# Altium PCB IMX6.PcbDoc (part 1 of 3)
Units mil, origin at the board's own origin, x right, y up, seen from the top; angles counter-clockwise.
Board outline 7950 x 5550 mil, 4 copper layers (Top Layer, GND, VCC, Bottom Layer), stack 30.634 mil thick; 238 components, 318 nets, 1023 pads, 393 vias.
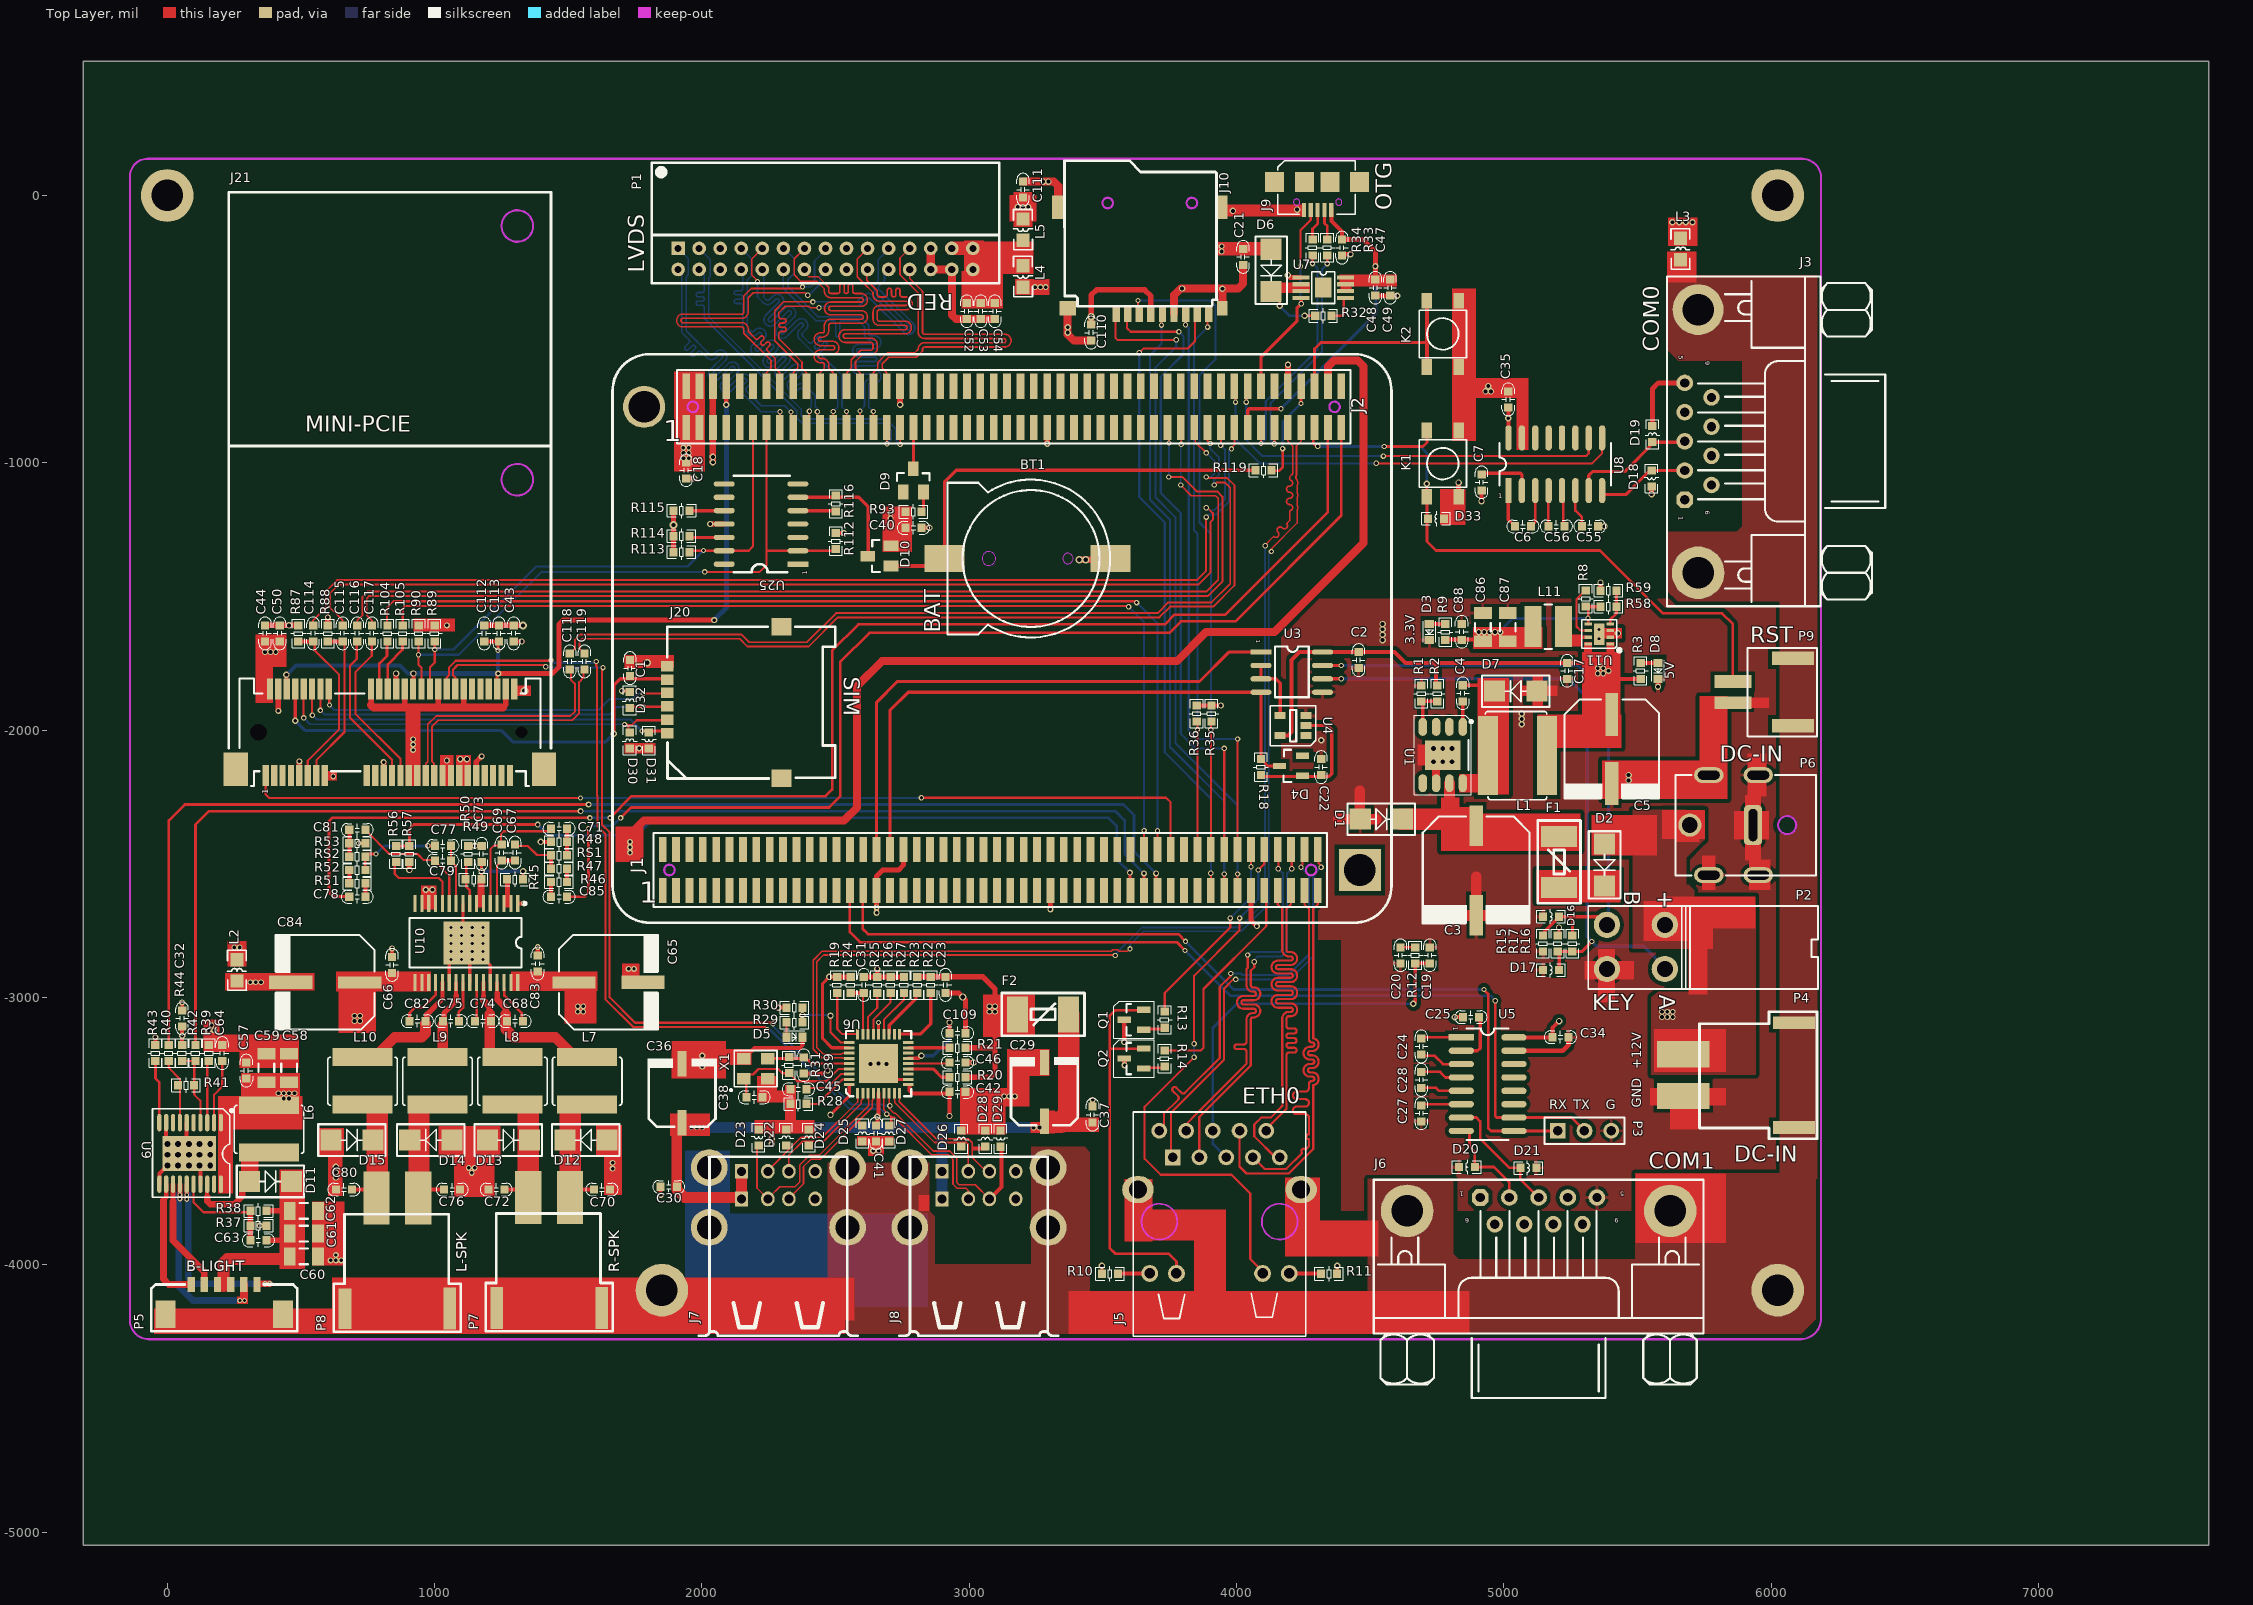
[diagram p0: Top Layer view]
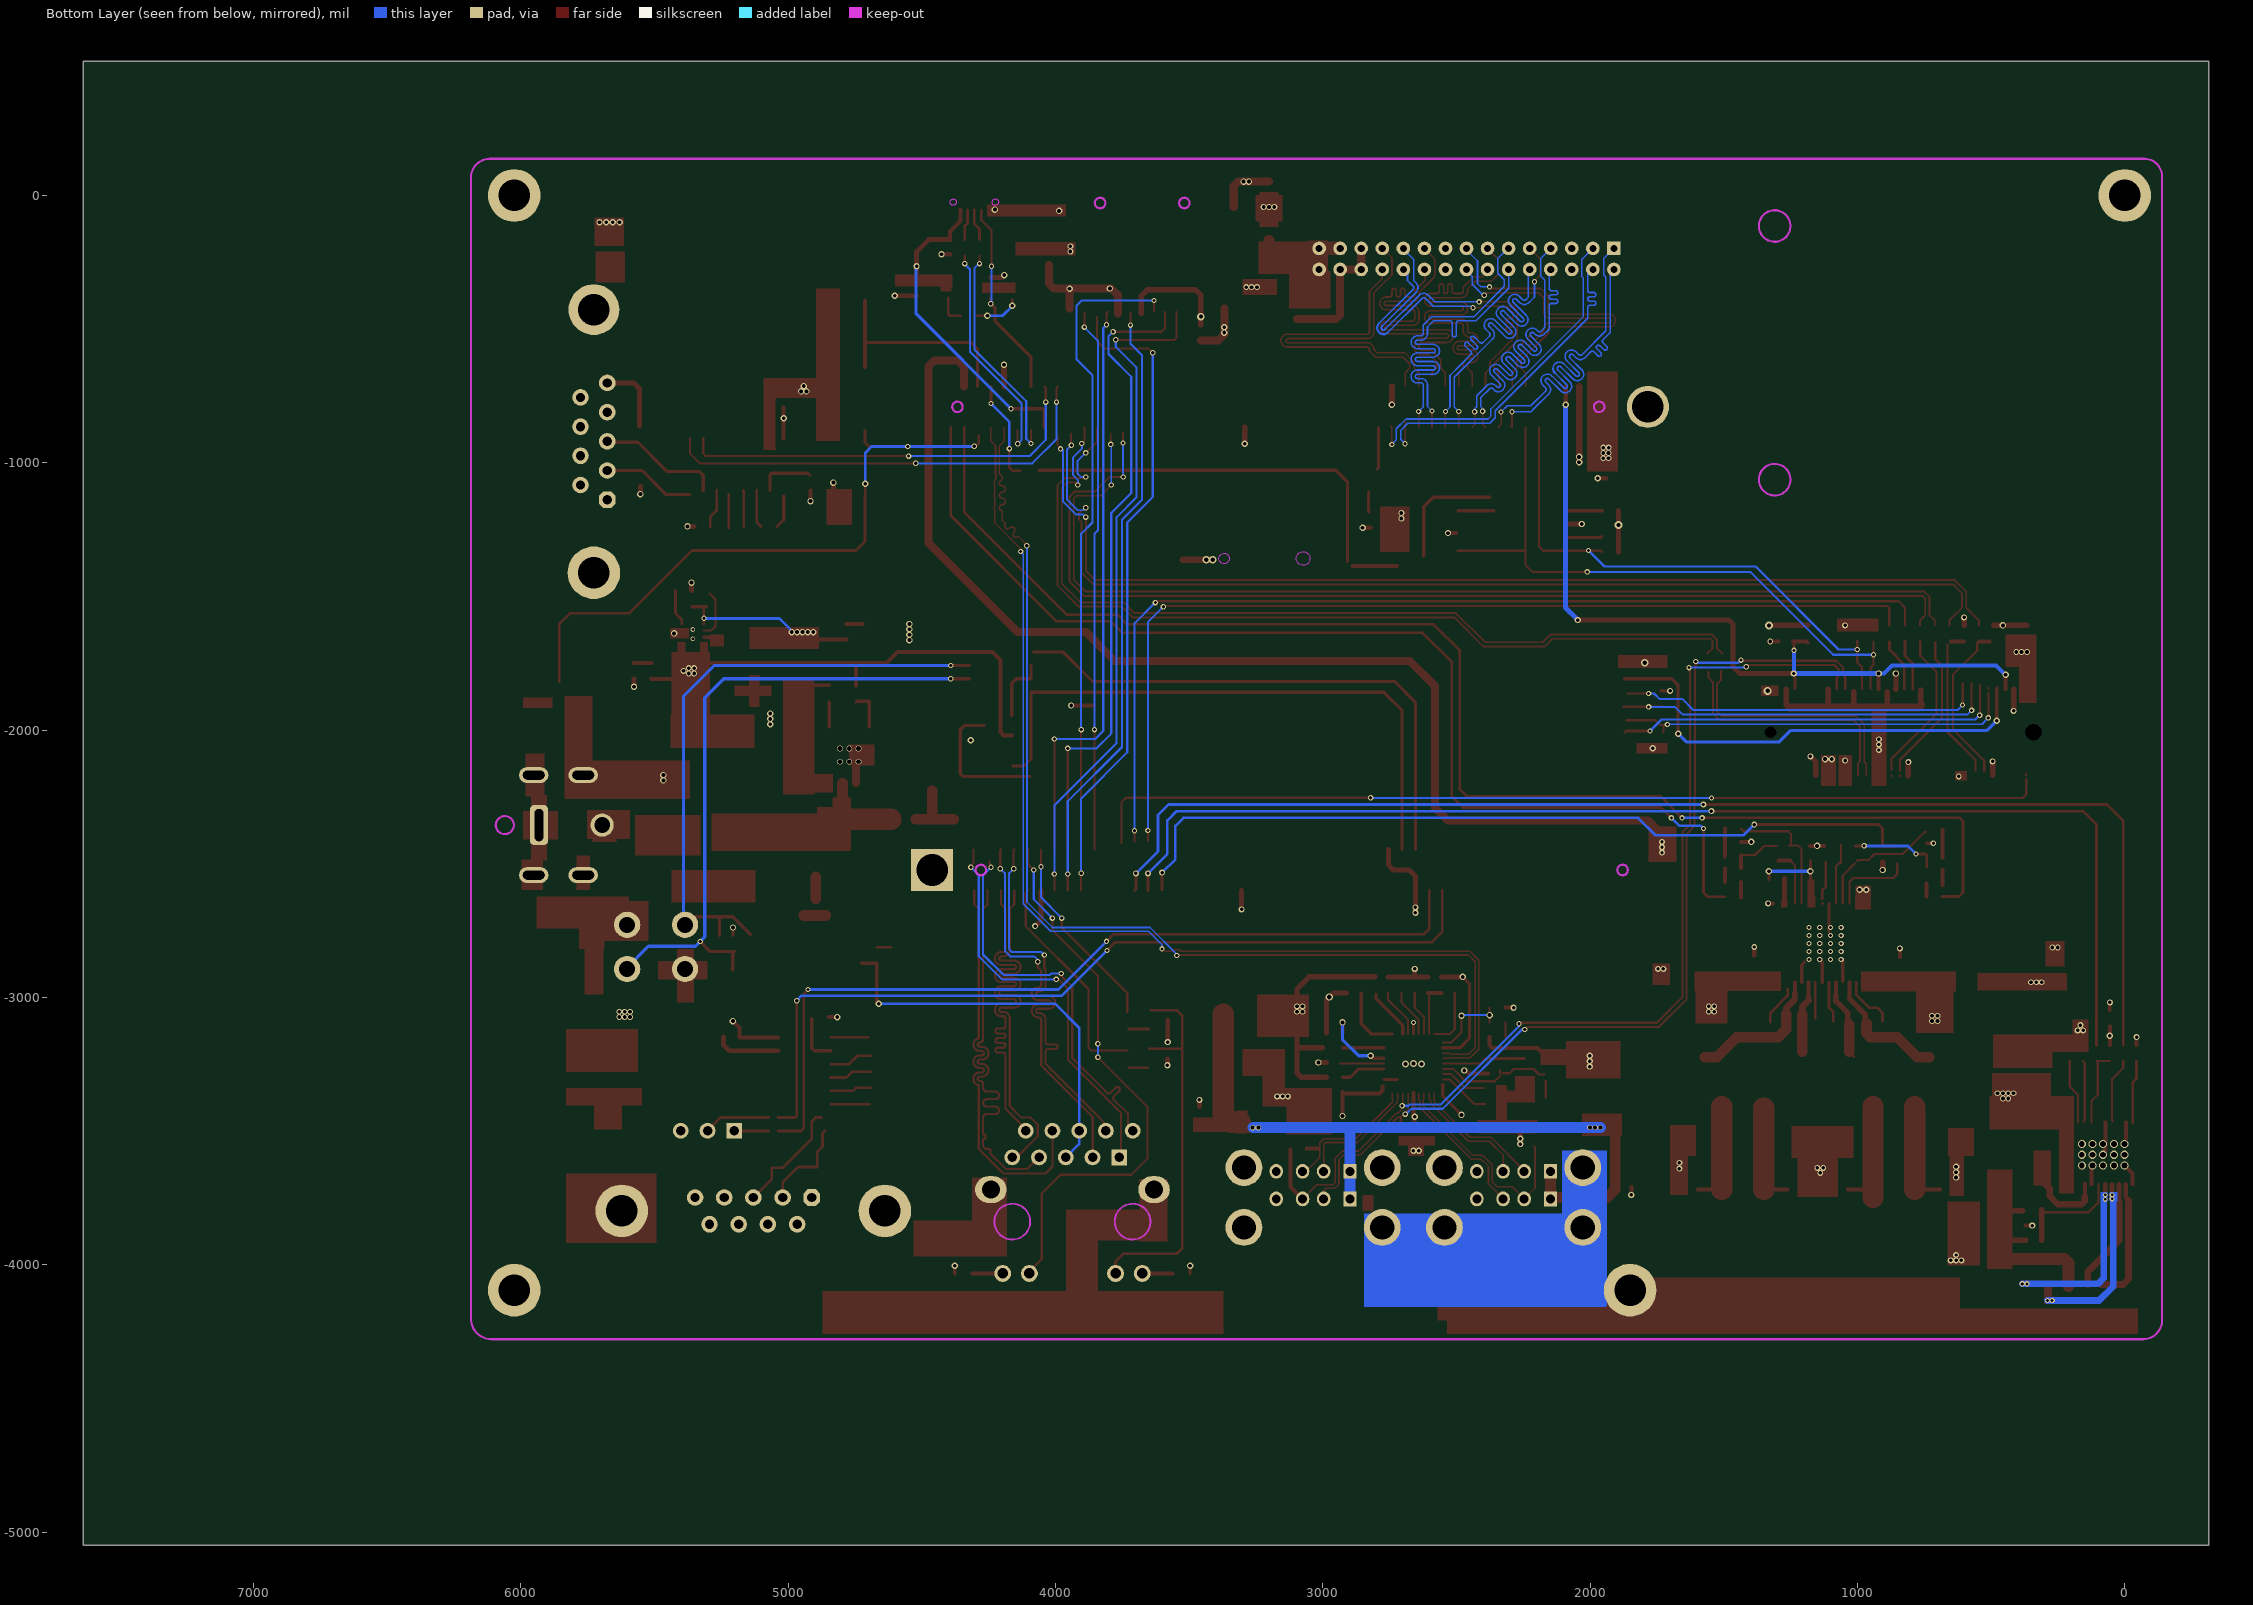
[diagram p1: Bottom Layer view, seen from below]
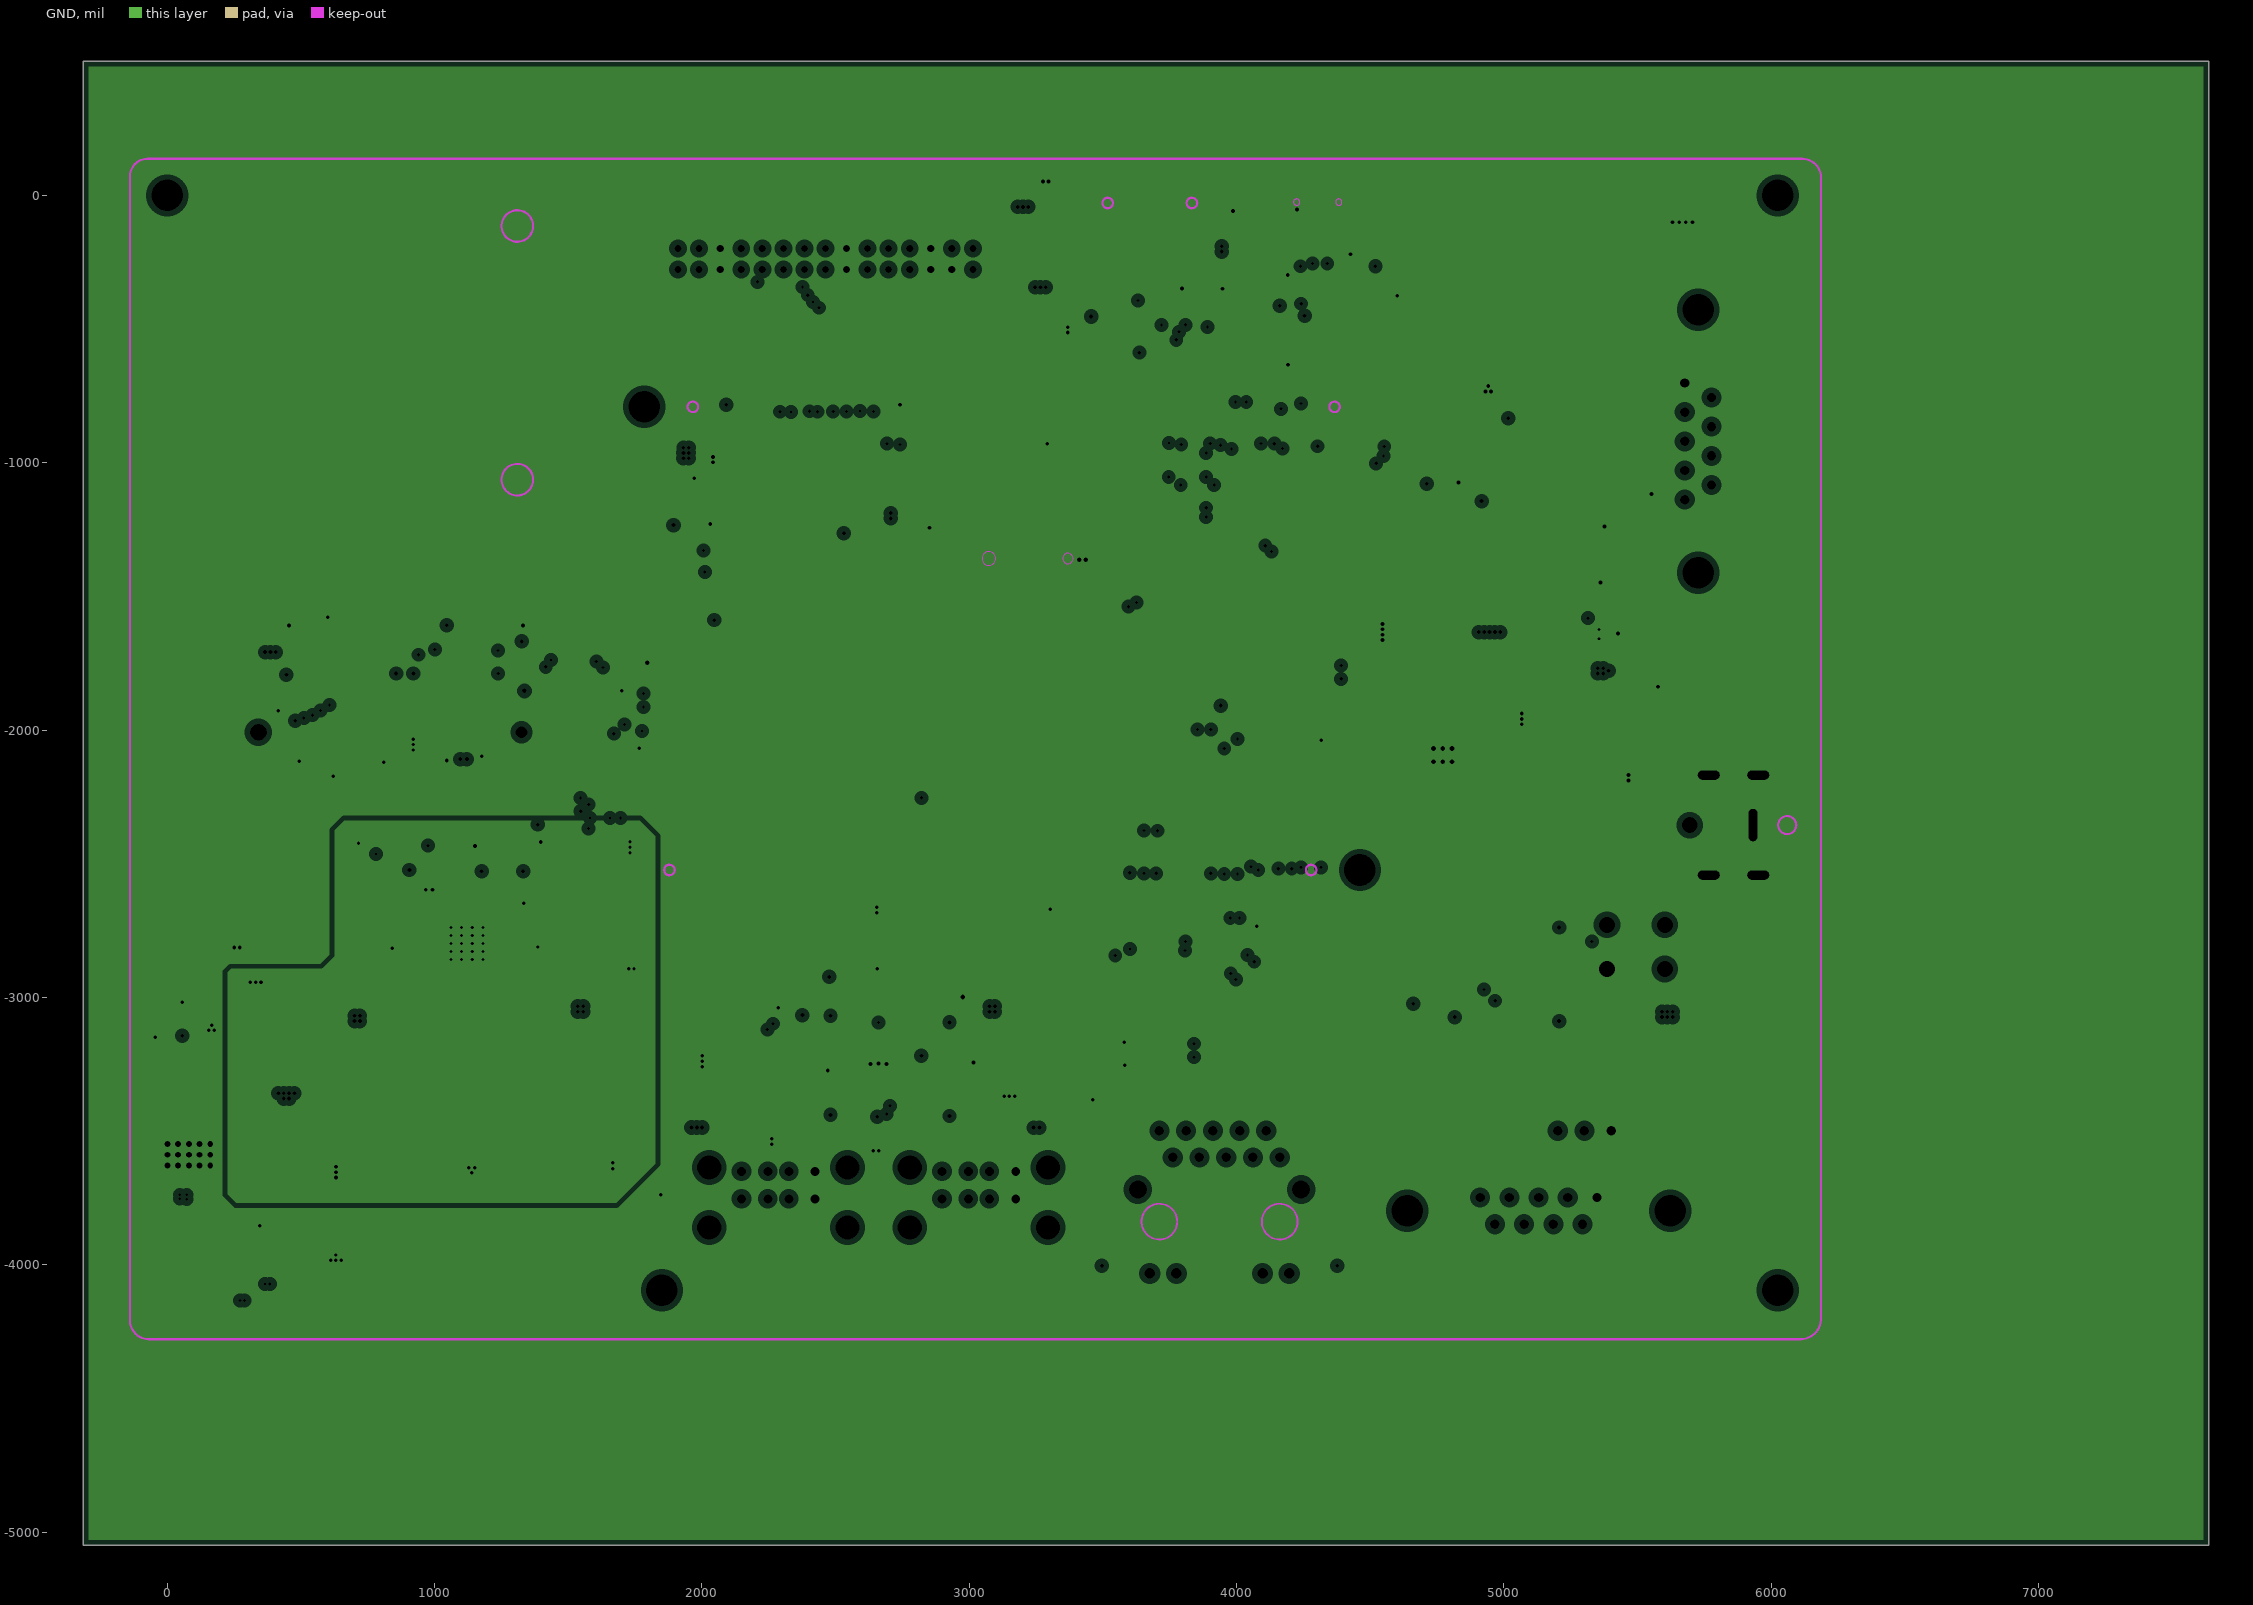
[diagram p2: GND, clearances drawn from the general rule]
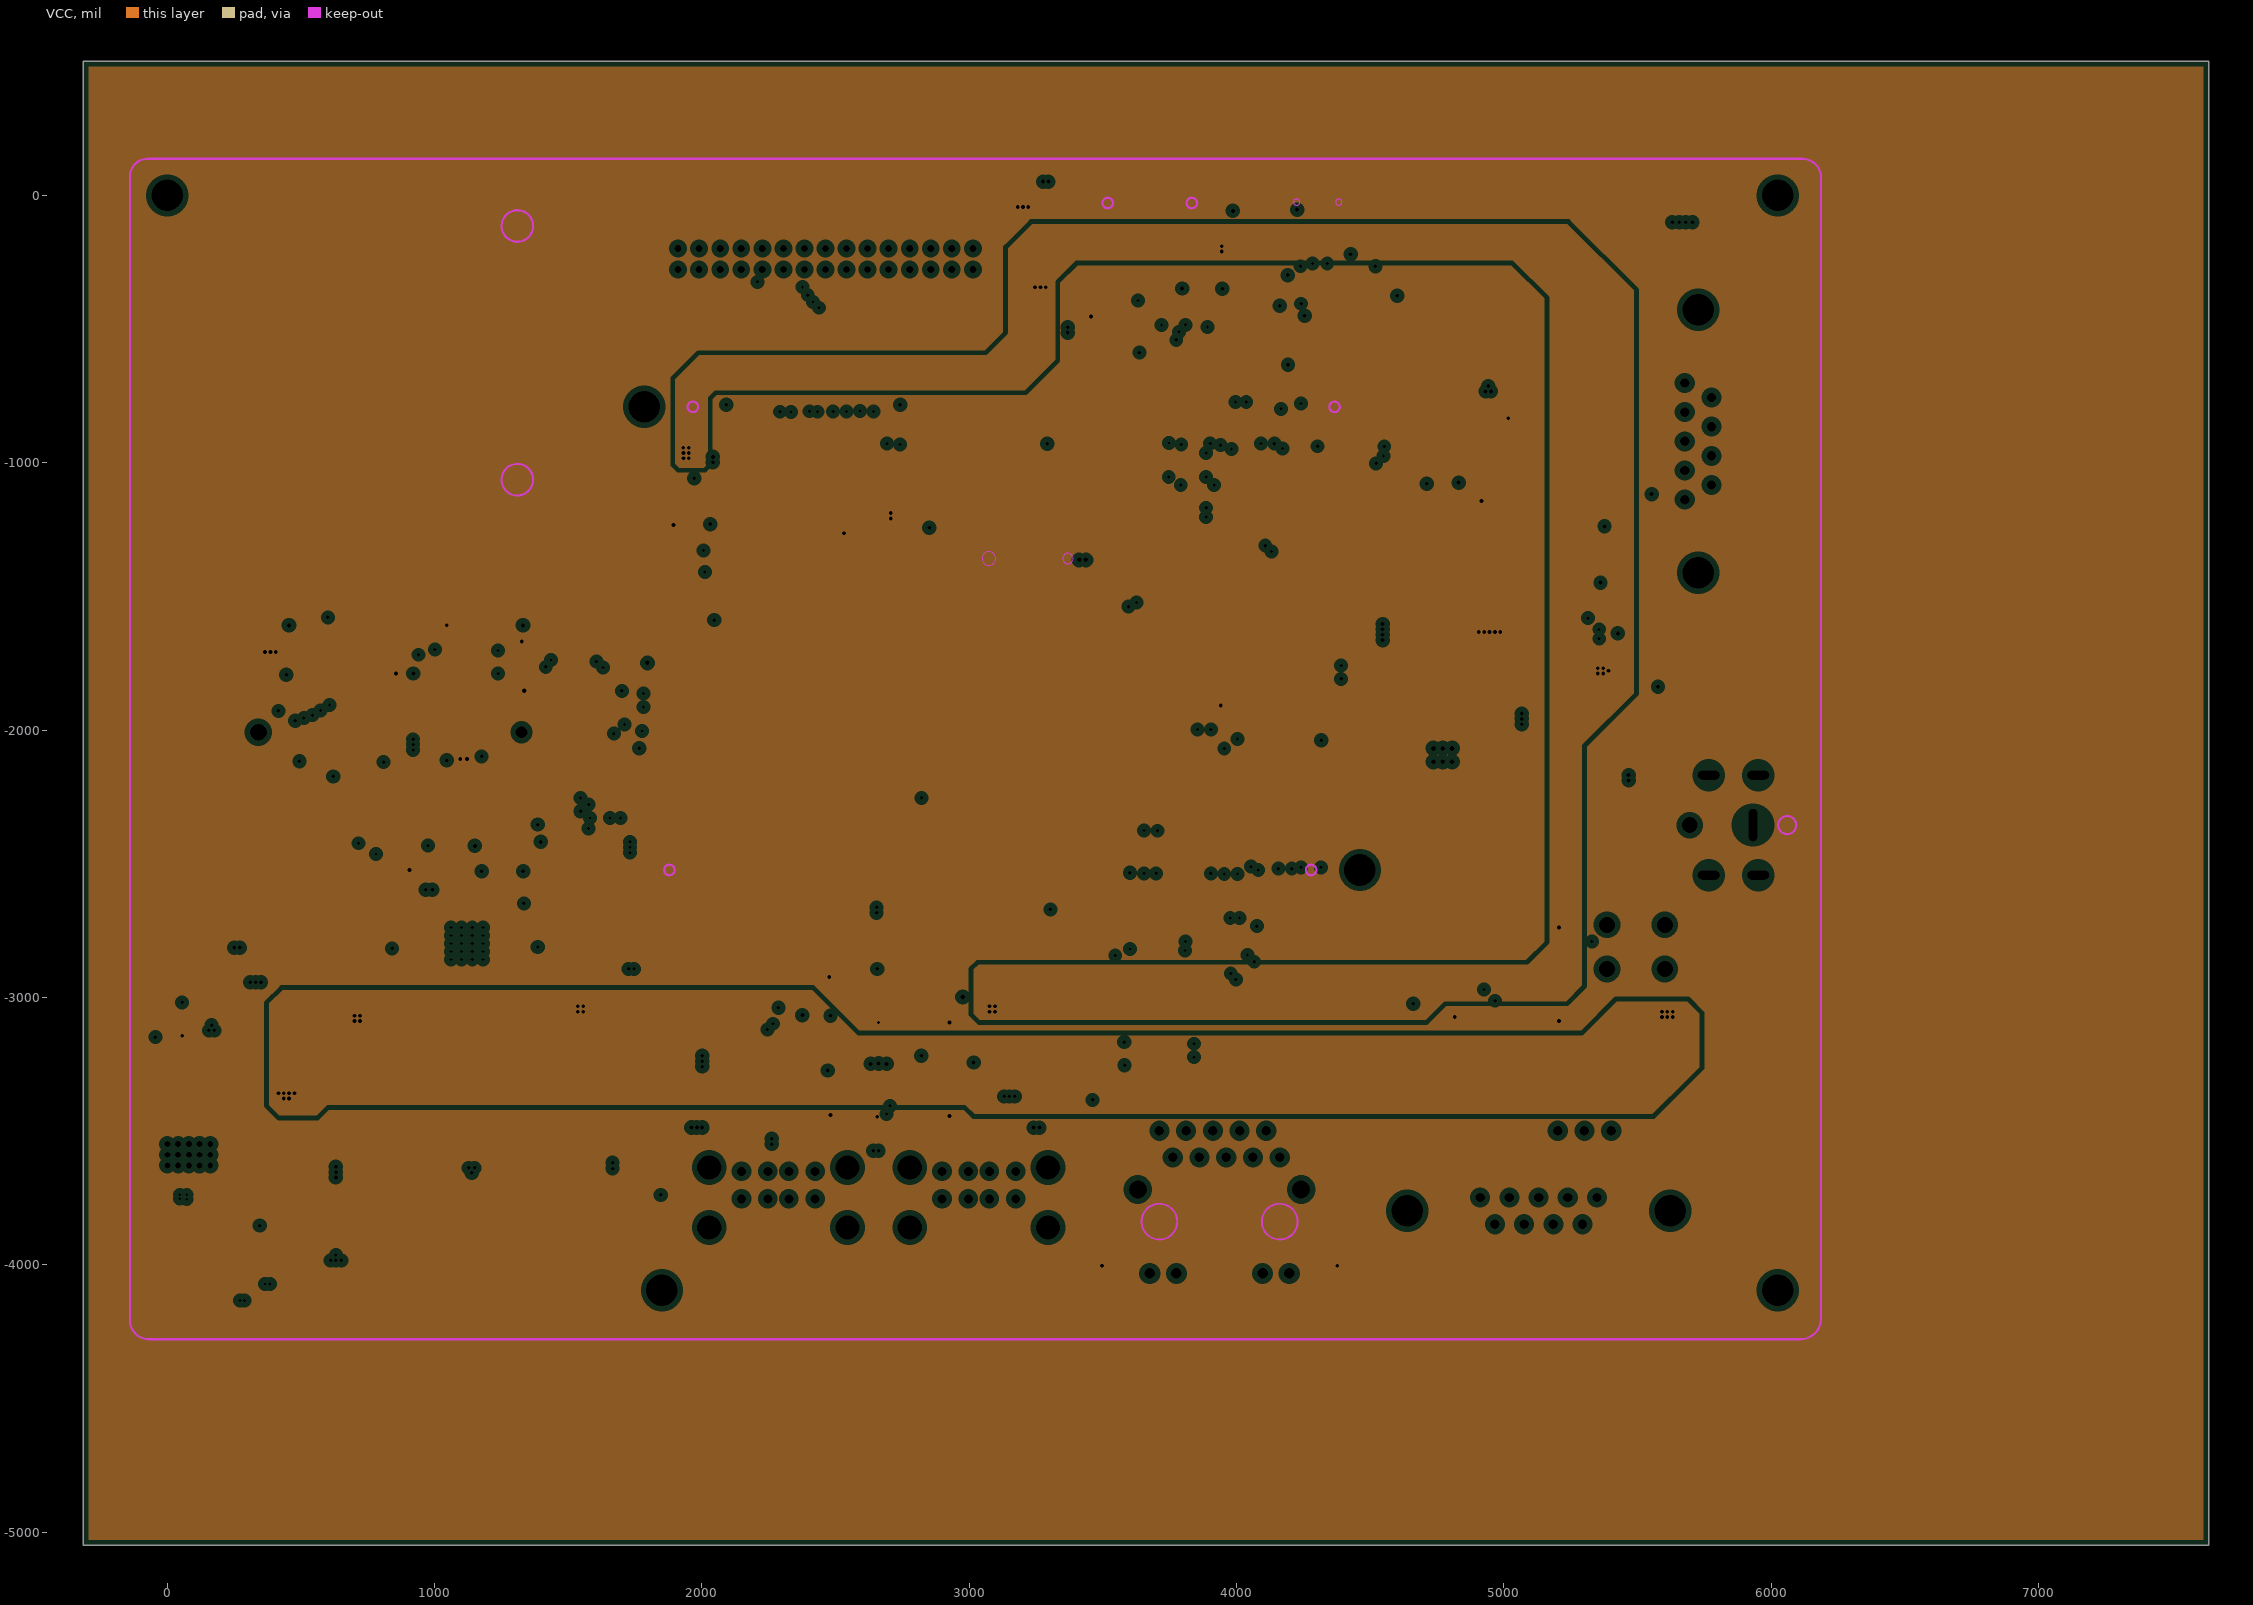
[diagram p3: VCC, clearances drawn from the general rule]

## Layer stack, top to bottom
Top Solder: solder mask 0.4, Solder Resist, Dk 3.5
Top Layer: signal copper 1.4
Dielectric1: core 10, FR-4, Dk 4.2
GND: plane copper 1.417
Dielectric5: prepreg 5, Dk 4.2
VCC: plane copper 1.417
Dielectric6: core 10, Dk 4.2
Bottom Layer: signal copper 1.4
Bottom Solder: solder mask 0.4, Solder Resist, Dk 3.5

## Board outline
-314,502 7636,502 7636,-5048 -314,-5048

## Design rules (kind name [scope] priority, off if disabled: settings)
Clearance [All] p1 off: gap=10 except(5: Track-Track Track-SMDPad Track-THPad Track-Via Track-Fill Track-Poly Track-Region Track-Text)
ComponentClearance [All] p1 off: gap=0 collisioncheckmode=3 verticalgap=0 showdistances=FALSE
DiffPairsRouting [All] p1: maxlimit=10 minlimit=8 mostfreqgap=8 toplayer_minwidth=15 toplayer_maxwidth=15 toplayer_prefwidth=15 bottomlayer_minwidth=15 bottomlayer_maxwidth=15 bottomlayer_prefwidth=15 maxuncoupledlength=500
FabricationTestpoint [(IsPad And (OnTopLayer Or OnBottomLayer))] p1: side=3 testpointundercomponent=TRUE minsize=40 maxsize=100 preferedsize=60 minholesize=0 maxholesize=40 preferedholesize=32 testpointgrid=1 allowsidetop=TRUE allowsidebottom=TRUE usegrid=TRUE gridtolerance=0.01
HoleSize [All] p1: absolutevalues=TRUE maxlimit=300 minlimit=1 maxpercent=80.000 minpercent=20.000
PlaneClearance [All] p1: clearance=20
PlaneConnect [All] p1: planeconnectstyle=Direct reliefexpansion=20 reliefentries=4 reliefconductorwidth=12 reliefairgap=10
PolygonConnect [All] p1: connectstyle=Relief reliefconductorwidth=12 reliefentries=4 polygonreliefangle="90 Angle" airgapwidth=10
RoutingVias [All] p1: holewidth=12 width=20 viastyle="Through Hole" minholewidth=8 minwidth=16 maxholewidth=200 maxwidth=300
SolderMaskExpansion [All] p1: expansion=4
Width [All] p1: maxlimit=200 minlimit=6 preferedwidth=10 minimp=50.000000 maximp=50.000000 favimp=50.000000
24 further rules are at their usual default settings.

## Classes and differential pairs
component class 7.MINIPCIE: C1 C109 C110 C111 C112 C113 C114 C115 C116 C117 C118 C119 D30 D31 D32 J20 J21 R87 R88 R89 R90 R104 R105
component class 0.CONNECTOR: C2 J1 J2
component class 11.EX-MODULE: C65 C66 C67 C68 C69 C70 C71 C72 C73 C74 C75 C76 C77 C78 C79 C80 C81 C82 C83 C84 C85 D12 D13 D14 D15 L7 L8 L9 L10 P7 P8 R45 R46 R47 R48 R49 R50 R51 R52 R53 R56 R57 RS1 RS2 U10
component class 1.POWER: C3 C4 C5 C17 C18 C86 C87 C88 D1 D2 D3 D7 D8 F1 L1 L2 L3 L11 P2 P4 P6 R1 R2 R3 R8 R9 R58 R59 U1 U11
component class 2.ETH: C19 C20 J5 Q1 Q2 R10 R11 R12 R13 R14
component class 3.UART: C6 C7 C21 C22 C23 C24 C25 C27 C28 C55 C56 D4 D16 D17 D18 D19 D20 D21 J3 J6 P3 R15 R16 R17 R18 U3 U4 U5 U8
component class 5.USB: C29 C30 C31 C32 C34 C35 C36 C37 C38 C39 C41 C42 C43 C44 C45 C46 C47 C48 C49 D5 D6 D22 D23 D24 D25 D26 D27 D28 D29 F2 J7 J8 J9 R19 R20 R21 R22 R23 R24 R25 R26 R27 R28 R29 R30 R31 R32 R33 R34 U6 U7 X1
component class 8.SATA&TFCARD: C40 C50 J10 R35 R36
component class 12.WTD&RTC: BT1 D9 D10 D33 K1 K2 P9 R93 R112 R113 R114 R115 R116 R119 U25
component class 10.LVDS: C52 C53 C54 C57 C58 C59 C60 C61 C62 C63 C64 D11 L4 L5 L6 P1 P5 R37 R38 R39 R40 R41 R42 R43 R44 U9
differential pair PCIE_TX: +PCIE_TX_P -PCIE_TX_N
differential pair PCIE_TXO: +PCIE_TXO_P -PCIE_TXO_N
differential pair PCIE_RX: +PCIE_RX_P -PCIE_RX_N
differential pair PCIE_RXO: +PCIE_RXO_P -PCIE_RXO_N
differential pair CLK1: +CLK1_P -CLK1_N
differential pair CLK1O: +CLK1O_P -CLK1O_N
differential pair LVDS0_CLK: +LVDS0_CLK_P -LVDS0_CLK_N
differential pair LVDS0_TX0: +LVDS0_TX0_P -LVDS0_TX0_N
differential pair LVDS0_TX1: +LVDS0_TX1_P -LVDS0_TX1_N
differential pair LVDS0_TX2: +LVDS0_TX2_P -LVDS0_TX2_N
differential pair LVDS0_TX3: +LVDS0_TX3_P -LVDS0_TX3_N
differential pair LVDS1_CLK: +LVDS1_CLK_P -LVDS1_CLK_N
differential pair LVDS1_TX0: +LVDS1_TX0_P -LVDS1_TX0_N
differential pair LVDS1_TX1: +LVDS1_TX1_P -LVDS1_TX1_N
differential pair LVDS1_TX2: +LVDS1_TX2_P -LVDS1_TX2_N
differential pair LVDS1_TX3: +LVDS1_TX3_P -LVDS1_TX3_N
differential pair TRX0: +TRX0_P -TRX0_N
differential pair TRX1: +TRX1_P -TRX1_N
differential pair TRX2: +TRX2_P -TRX2_N
differential pair TRX3: +TRX3_P -TRX3_N
differential pair USB_H1_D: +USB_H1_D_P -USB_H1_D_N
differential pair USB_OTG_D: +USB_OTG_VBUS -USB_OTG_D_N
differential pair USB_PORT1: +USB_PORT1_P -USB_PORT1_N
differential pair USB_PORT2: +USB_PORT2_P -USB_PORT2_N
differential pair USB_PORT3: +USB_PORT3_P -USB_PORT3_N
differential pair USB_PORT4: +USB_PORT4_P -USB_PORT4_N

## Components (designator, comment, footprint, x,y, rotation, side; value= is the part's Value field where it differs from the comment)
BT1 "" CR1220 3231,-1358 r180 top
C1 "0.1uF" 0603C 1731,-1768 r180 top
C2 "0.1uF" 0603C 4456,-1738 r0 top
C3 "Cap Pol3" C10-SMD 4896,-2523 r270 top
C4 "Cap" 0603C 4846,-1862 r0 top
C5 "Cap Pol3" C8X10-SMD 5403,-2070 r270 top
C6 "0.1uF" 0603C 5071,-1238 r90 top
C7 "0.1uF" 0603C 4916,-1073 r0 top
C17 "10uF" 0603C 5236,-1778 r0 top
C18 "0.1uF" 0603C 1941,-1028 r0 top
C19 "0.1uF" 0603C 4723,-2842 r180 top
C20 "NC(1uF)" 0603C 4613,-2842 r180 top
C21 "0.1uF" 0603C 4024,-230 r0 top
C22 "1nF" 0603C 4316,-2138 r0 top
C23 "0.1uF" 0603C 2911,-2953 r0 top
C24 "0.1uF" 0603C 4691,-3183 r0 top
C25 "0.1uF" 0603C 4876,-3073 r270 top
C27 "0.1uF" 0603C 4691,-3433 r0 top
C28 "0.1uF" 0603C 4691,-3308 r0 top
C29 "220uF/16V" C6.3x5.4-SMD 3281,-3353 r90 top
C30 "0.1uF" 0603C 1876,-3708 r90 top
C31 "0.1uF" 0603C 2606,-2953 r0 top
C32 "4.7uF" 0603C 56,-3078 r0 top
C34 "4.7uF" 0603C 5211,-3148 r270 top
C35 "0.1uF" 0603C 5016,-763 r0 top
C36 "220uF/16V" C6.3x5.4-SMD 1926,-3358 r90 top
C37 "0.1uF" 0603C 3461,-3438 r0 top
C38 "18pF" 0603C 2196,-3373 r270 top
C39 "18pF" 0603C 2381,-3253.52 r180 top
C40 "0.1uF" 0603C 2791,-1243 r270 top
C41 "0.1uF" 0603C 2651,-3508 r180 top
C42 "0.1uF" 0603C 2956,-3353 r270 top
C43 "0.1uF" 0603C 1296,-1638 r0 top
C44 "4.7uF" 0603C 366,-1638 r0 top
C45 "1uF" 0603C 2361,-3343 r90 top
C46 "1uF" 0603C 2956,-3243 r270 top
C47 "0.1uF" 0603C 4394,-195 r180 top
C48 "22uF" 0603C 4519,-345 r180 top
C49 "22uF" 0603C 4574,-345 r180 top
C50 "22uF" 0603C 421,-1638 r0 top
C52 "0.1uF" 0603C 2991,-433 r0 top
C53 "22uF" 0603C 3043,-433 r180 top
C54 "22uF" 0603C 3096,-433 r180 top
C55 "0.1uF" 0603C 5321,-1238 r90 top
C56 "0.1uF" 0603C 5196,-1238 r90 top
C57 "Cap" 0603C 296,-3273 r180 top
C58 "Cap" C1206 456,-3263 r270 top
C59 "Cap" C1206 371,-3263 r270 top
C60 "Cap" C1206 511,-3968 r180 top
C61 "Cap" C1206 511,-3883 r180 top
C62 "Cap" C1206 511,-3798 r180 top
C63 "Cap" 0603C 341,-3908 r90 top
C64 "Cap" 0603C 206,-3208 r0 top
C65 "470U/35V" C8X10-SMD 1651,-2943 r0 top
C66 "224" 0603C 841,-2878 r180 top
C67 "105" 0603C 1301,-2458 r0 top
C68 "224" 0603C 1301,-3088 r270 top
C69 "301" 0603C 1251,-2458 r180 top
C70 "105" 0603C 1626,-3718 r270 top
C71 "105" 0603C 1466,-2368 r270 top
C72 "105" 0603C 1231,-3718 r270 top
C73 "105" 0603C 1176,-2463 r0 top
C74 "224" 0603C 1181,-3088 r90 top
C75 "224" 0603C 1061,-3088 r270 top
C76 "105" 0603C 1066,-3718 r270 top
C77 "105" 0603C 1031,-2433 r90 top
C78 "106" 0603C 711,-2623 r90 top
C79 "301" 0603C 1031,-2488 r270 top
C80 "105" 0603C 661,-3718 r270 top
C81 "105" 0603C 711,-2373 r90 top
C82 "224" 0603C 936,-3088 r90 top
C83 "224" 0603C 1386,-2873 r180 top
C84 "470U/35V" C8X10-SMD 591,-2943 r180 top
C85 "106" 0603C 1466,-2623 r270 top
C86 "100uF" C1206 4921,-1615 r90 top
C87 "100uF" C1206 5014,-1615 r90 top
C88 "0.1uF" 0603C 4842,-1632 r180 top
C109 "0.1uF" 0603C 2956,-3133 r90 top
C110 "0.1uF" 0603C 3456,-513 r0 top
C111 "22uF" 0603C 3201,22 r180 top
C112 "0.1uF" 0603C 1186,-1638 r180 top
C113 "0.1uF" 0603C 1241,-1638 r180 top
C114 "0.1uF" 0603C 546,-1638 r0 top
C115 "0.1uF" 0603C 656,-1638 r0 top
C116 "0.1uF" 0603C 711,-1638 r0 top
C117 "0.1uF" 0603C 766,-1638 r0 top
C118 "0.1uF" 0603C 1506,-1743 r0 top
C119 "0.1uF" 0603C 1561,-1743 r0 top
D1 "SMAJ16A" SMA 4541,-2333 r0 top
D2 "SS54" SMA 5376,-2504 r270 top
D3 "发光二极管" 0603D 4721,-1633 r180 top
D4 "BAT54C" SOT-23#1 4261,-2093 r0 top
D5 "发光二极管" 0603D 2346,-3148 r270 top
D6 "SS24(NC)" SMA 4129,-280 r270 top
D7 "SS54" SMA 5044,-1854 r180 top
D8 "发光二极管" 0603D 5576,-1778 r180 top
D9 "BAT54C" SOT-23#2 2831,-1123 r270 top
D10 "BAT54C" SOT-23#2 2721,-1308 r0 top
D11 "SS210" SMA 386,-3688 r0 top
D12 "M7" SMA 1566,-3533 r180 top
D13 "M7" SMA 1276,-3533 r0 top
D14 "M7" SMA 986,-3533 r180 top
D15 "M7" SMA 691,-3533 r0 top
D16 "ESD" 0603L 5176,-2698 r270 top
D17 "ESD" 0603L 5176,-2898 r270 top
D18 "ESD" 0603L 5551,-1058 r180 top
D19 "ESD" 0603L 5556,-893 r0 top
D20 "ESD" 0603L 4861,-3633 r90 top
D21 "ESD" 0603L 5091,-3638 r270 top
D22 "ESD" 0603L 2316,-3523 r0 top
D23 "ESD" 0603L 2211,-3523 r180 top
D24 "ESD" 0603L 2401,-3523 r0 top
D25 "ESD" 0603L 2601,-3508 r0 top
D26 "ESD" 0603L 2971,-3528 r0 top
D27 "ESD" 0603L 2701,-3508 r0 top
D28 "ESD" 0603L 3061,-3528 r0 top
D29 "ESD" 0603L 3116,-3528 r180 top
D30 "ESD" 0603L 1731,-2038 r0 top
D31 "ESD" 0603L 1801,-2038 r180 top
D32 "ESD" 0603L 1731,-1888 r0 top
D33 "ESD" 0603L 4746,-1208 r90 top
F1 "Fuse Thermal" 1812F 5206,-2588 r90 top
F2 "1A  FUSE" 1812F 3181,-3063 r0 top
J1 "CON50X2" IDC50X2-1.27MM_SMT 3078.52,-2523 r0 top locked
J2 "CON50X2" IDC50X2-1.27MM_SMT 3166.31,-790.72 r0 top locked
J3 "DB9" DB-9/M#1 5676,-1138 r180 top
J5 "48F-01GY2DPL2NL" RJ45C-48F-01GY2DPL2NL 3711,-3498 r0 top locked
J6 "DB9" DB-9/M#2 4911,-3748 r90 top
J7 "USB-D" USB-D 2286,-3748 r180 top
J8 "USB-D" USB-D 3036,-3748 r180 top
J9 "USB_AB" MICROUSB 4224,-25 r0 top
J10 "TF-CARD" TF-CARD 3607,-370 r270 top
J20 "MICRO-SIM" MACRO-SIM 2298,-1613 r270 top
J21 "Mini PCI Express" MINI-PCIE 341,-2008 r0 top locked
K1 "KEY" SS-SPB-4.5 4771,-1003 r270 top
K2 "KEY" SS-SPB-4.5 4771,-518 r270 top
L1 "Inductor" L-8040 4940,-2095 r0 top
L2 "电感" 0805L 261,-2858 r0 top
L3 "电感" 0805L 5660,-160 r0 top
L4 "NC" 0805L 3201,-343 r180 top
L5 "电感" 0805L 3201,-168 r180 top
L6 "Inductor" L-6045 381,-3403 r270 top
L7 "10UH" L-6045 1571,-3223 r270 top
L8 "10UH" L-6045 1291,-3223 r270 top
L9 "10UH" L-6045 1011,-3223 r270 top
L10 "10UH" L-6045 731,-3223 r270 top
L11 "2.2uH" SDRH0420 5166,-1613 r180 top
P1 "Header 15X2" 2.0-15P*2 1911,-198 r0 top locked
P2 "POWIN" 5569 5385,-2728 r270 top
P3 "TTL" HDR1X3 5201,-3498 r0 top
P4 "POW-IN" VH3.96-2P-SMT#1 5671,-3368 r90 top
P5 "Header 6" 1.25MM-6P 336,-4073 r0 top
P6 "POW-IN" DC-5525 5951,-2168 r270 top
P7 "CON2" VH3.96-2P-SMT#1 1351,-3748 r0 top
P8 "CON2" VH3.96-2P-SMT#2 783,-3750 r0 top
P9 "RST" PH2.0-2-SMT 5856,-1818 r270 top
Q1 "9012" SOT-23-PMOS 3616,-3083 r180 top
Q2 "9012" SOT-23-PMOS 3616,-3228 r180 top
R1 "Res1" 0603R 4691,-1863 r0 top
R2 "Res1" 0603R 4751,-1863 r0 top
R3 "Res1" 0603R 5511,-1778 r180 top
R8 "180K" 0603R 5306,-1508 r180 top
R9 "1K" 0603R 4781,-1633 r0 top
R10 "1K" 0603R 3526,-4033 r270 top
R11 "1K" 0603R 4346,-4033 r90 top
R12 "NC(0)" 0603R 4668,-2842 r0 top
R13 "4.7K" 0603R 3731,-3083 r180 top
R14 "4.7K" 0603R 3731,-3228 r180 top
R15 "1K" 0603R 5146,-2798 r0 top
R16 "120(NC)" 0603R 5256,-2798 r180 top
R17 "1K" 0603R 5201,-2798 r0 top
R18 "22K" 0603R 4091,-2138 r180 top
R19 "0R" 0603R 2506,-2953 r180 top
R20 "10K" 0603R 2956,-3298 r270 top
R21 "10K" 0603R 2956,-3188 r270 top
R22 "10K" 0603R 2856,-2953 r0 top
R23 "10K" 0603R 2806,-2953 r0 top
R24 "100K" 0603R 2556,-2953 r0 top
R25 "100K" 0603R 2656,-2953 r180 top
R26 "100K" 0603R 2706,-2953 r180 top
R27 "100K" 0603R 2756,-2953 r180 top
R28 "12K 1%" 0603R 2361,-3398 r90 top
R29 "1K" 0603R 2346,-3093 r90 top
R30 "100K" 0603R 2346,-3038 r270 top
R31 "1M" 0603R 2326,-3253 r180 top
R32 "10K(NC)" 0603R 4324,-450 r270 top
R33 "33R" 0603R 4339,-195 r0 top
R34 "33R" 0603R 4284,-195 r0 top
R35 "10K" 0603R 3906,-1938 r180 top
R36 "10K" 0603R 3851,-1938 r180 top
R37 "Res1" 0603R 341,-3853 r270 top
R38 "Res1" 0603R 341,-3798 r90 top
R39 "Res1" 0603R 156,-3208 r0 top
R40 "Res1" 0603R 6,-3208 r180 top
R41 "Res1" 0603R 71,-3328 r90 top
R42 "Res1" 0603R 106,-3208 r180 top
R43 "Res1" 0603R -44,-3208 r180 top
R44 "Res1" 0603R 56,-3208 r180 top
R45 "20K" 0603R 1301,-2558 r270 top
R46 "330R" 0603R 1466,-2568 r90 top
R47 "4K7" 0603R 1466,-2518 r90 top
R48 "4K7" 0603R 1466,-2418 r270 top
R49 "100K" 0603R 1146,-2558 r90 top
R50 "20K" 0603R 1126,-2463 r180 top
R51 "330R" 0603R 711,-2573 r270 top
R52 "4K7" 0603R 711,-2523 r270 top
R53 "4K7" 0603R 711,-2423 r90 top
R56 "2K" 0603R 856,-2463 r0 top
R57 "10K" 0603R 906,-2463 r180 top
R58 "180K" 0603R 5391,-1538 r270 top
R59 "180K" 0603R 5391,-1478 r90 top
R87 "49.9R  1%" 0603R 491,-1638 r0 top
R88 "49.9R  1%" 0603R 601,-1638 r0 top
R89 "4.7K(NC)" 0603R 1000,-1638 r0 top
R90 "4.7K(NC)" 0603R 941,-1638 r0 top
R93 "10K" 0603R 2791,-1183 r270 top
R104 "0R(NC)" 0603R 824,-1638 r0 top
R105 "0R(NC)" 0603R 881,-1638 r0 top
R112 "4.7K(NC)" 0603R 2501,-1293 r180 top
R113 "4.7K(NC)" 0603R 1924,-1334 r270 top
R114 "10K" 0603R 1924,-1274 r270 top
R115 "10K" 0603R 1924,-1179 r270 top
R116 "0(NC)" 0603R 2501,-1153 r180 top
R119 "0(NC)" 0603R 4101,-1028 r270 top
RS1 "NC" 0603R 1466,-2468 r90 top
RS2 "NC" 0603R 711,-2473 r270 top
U1 "LM22676" SOP8-POW 4771,-2093 r270 top
U3 "MAX485ESA" SOP8-1.27 4091,-1708 r0 top
U4 "SN74LVC1G04" SOT23-5N 4211,-1983 r180 top
U5 "SP3232EEN" SOIC16-1.27 4936,-3298 r0 top
U6 "USB2514BI" QFN-36 2661,-3248 r90 top
U7 "TPS2061DGN(NC)" MSOP-8 4324,-345 r0 top
U8 "SP3232EEN" SOIC16-1.27 5166,-1008 r90 top
U9 "TPS61194" HTTSOP-20 201,-3468 r270 top
U10 "TPA3116" HTSSOP-32 1311,-2648 r180 top
U11 "TLV62084" WSON8 5356,-1668 r180 top
U25 "RX8025-SA" SOP14-1.27 2359,-1379 r180 top
X1 "24M" OSC4-3225 2156,-3303 r0 top

## Footprints (in the part's own frame and the unit in brackets; to place one, negate y for a bottom-side part, rotate by r counter-clockwise, add the part's x,y. Pads: shape width x height; smd on the part's side, far side on the other; paste and mask are expansions set on the pad)
1.25MM-6P [mm]
  rect 1.9x2.6 smd: 0(-8.7,-2.835) 0(2.45,-2.835)
  rect 0.7x1.4 smd: 1(-6.25,0) 2(-5,0) 3(-3.75,0) 4(-2.5,0) 5(-1.25,0) 6(0,0)
  silkscreen extent -10.03,-4.44 3.81,0
2.0-15P*2 [mm]
  rect 1.301x1.301 hole 0.68: 1(0,0)
  round 1.301 hole 0.68: 2(0,-2) 3(2,0) 4(2,-2) 5(4,0) 6(4,-2) 7(6,0) 8(6,-2) 9(8,0) 10(8,-2) 11(10,0) 12(10,-2) 13(12,0) 14(12,-2) 15(14,0) 16(14,-2) 17(16,0) 18(16,-2) 19(18,0) 20(18,-2) 21(20,0) 22(20,-2) 23(22,0) 24(22,-2) 25(24,0) 26(24,-2) 27(26,0) 28(26,-2) 29(28,0) 30(28,-2)
  silkscreen extent -2.5,-3.3 30.5,8.15
0603C [mil]
  rect 31.5x30 smd: 1(0,30) 2(0,-30)
  silkscreen extent -24,-60 24,60
0603D [mil]
  rect 35.43x30 smd: A(0,-30) K(0,30)
  silkscreen extent -24,-40 24,39
0603L [mil]
  rect 31.5x30 smd: 1(-0.91,-29.91) 2(-0.91,30.09)
  silkscreen extent -28,-54 27,54
0603R [mil]
  rect 31.5x30 smd: 1(0,30) 2(0,-30)
  silkscreen extent -28,-53 28,53
0805L [mil]
  rect 50x50 smd: 1(0,0) 2(0,-80)
  silkscreen extent -35,-115 36,35
1812F [mm]
  rect 2x3.4 smd: 1(0,0) 2(4.85,0)
  silkscreen extent -1.5,-2.03 6.35,2.03
5569 [mm]
  round 2.5 hole 1.524: 1(0,0) 2(4.2,0) 3(4.2,5.5) 4(0,5.5)
  silkscreen extent -1.78,-1.78 6.1,20.07
C6.3x5.4-SMD [mm]
  rect 2.4x0.85 smd: 1(-2.794,0) 2(2.794,0)
  silkscreen extent -3.17,-3.3 3.3,3.3, body extent -3.24,-3.18 3.24,3.18, height 3.5
C8X10-SMD [mm]
  rect 4.1x1.148 smd: 1(-3.277,0)
  rect 4.1x1.25 smd: 2(3.277,0)
  silkscreen extent -4.7,-4.5 4.7,4.5, body extent -4.65,-4.25 4.65,4.25, height 10.5
C10-SMD [mm]
  rect 3.85x1.25 smd: 1(-4.191,0) 2(4.318,0)
  silkscreen extent -5.08,-5.08 5.08,5.08
C1206 [mm] "Chip Capacitor, Body 3.2x1.6mm, IPC High Density"
  rect 1.1x1.7 smd: 1(-1.35,0) 2(1.35,0)
  silkscreen extent -0.4,-0.75 0.4,0.75, body extent -1.7,-0.9 1.7,0.9, height 1.3
CR1220 [mm]
  rect 3.8x2.6 smd: 1(8.23,0) 2(-7.57,0)
  Keep-Out Layer circle w0.1: c4,0 r0.65
  Keep-Out Layer circle w0.1: c-3.5,0 r0.5
  silkscreen extent -7.5,-7.5 7.94,7.5
DB-9/M#1 [mil]
  oct 62x62 hole 35: 1(0,0)
  round 62 hole 35: 2(0,-109.17) 3(0,-218.33) 4(0,-327.5) 5(0,-436.67) 6(-100,-55) 7(-100,-164.17) 8(-100,-273.33) 9(-100,-382.5)
  round 190 hole 118.33: BO1(-50,-710.83)
  round 196.67 hole 118.33: BO2(-50,273.33)
  silkscreen extent -750,-835 67,398
DB-9/M#2 [mil]
  oct 62x62 hole 35: 1(0,0)
  round 62 hole 35: 2(0,-109.17) 3(0,-218.33) 4(0,-327.5) 5(0,-436.67) 6(-100,-55) 7(-100,-164.17) 8(-100,-273.33) 9(-100,-382.5)
  round 196.67 hole 118.33: BO1(-50,-710.83) BO2(-50,273.33)
  silkscreen extent -750,-835 67,398
DC-5525 [mm]
  oval 1.5x2.8 hole 0.85 slot 2.06 at 90 deg: 1(0,0) 1(0,-4.7) 1(9.5,-4.7) 1(9.5,0)
  rrect50% 3.8x1.75 hole 0.83 slot 3.05 at 0 deg: 1(4.75,-0.5)
  round 2.2 hole 1.5: 2(4.75,-6.5)
  Keep-Out Layer circle w0.2: c4.75,2.75 r0.86
  silkscreen extent 0,-7.87 9.53,5.5
HDR1X3 [mm] "Connector; Header; 3 Position"
  rect 1.5x1.5 hole 0.9: 1(0,0)
  round 1.5 hole 0.9: 2(2.54,0) 3(5.08,0)
  silkscreen extent -1.27,-1.27 6.35,1.27
HTSSOP-32 [mm]
  rect 0.3x1.6 smd: 1(0,0) 2(0.65,0) 3(1.3,0) 4(1.95,0) 5(2.6,0) 6(3.25,0) 7(3.9,0) 8(4.55,0) 9(5.2,0) 10(5.85,0) 11(6.5,0) 12(7.15,0) 13(7.8,0) 14(8.45,0) 15(9.1,0) 16(9.75,0) 17(9.75,7.5) 18(9.1,7.5) 19(8.45,7.5) 20(7.8,7.5) 21(7.15,7.5) 22(6.5,7.5) 23(5.85,7.5) 24(5.2,7.5) 25(4.55,7.5) 26(3.9,7.5) 27(3.25,7.5) 28(2.6,7.5) 29(1.95,7.5) 30(1.3,7.5) 31(0.65,7.5) 32(0,7.5)
  rect 4.36x4.11 smd: 33(4.875,3.75)
  silkscreen extent -0.83,-0.12 10.29,6.1
HTTSOP-20 [mm]
  oval 1.65x0.4 smd: 1(0,0) 2(0,-0.65) 3(0,-1.3) 4(0,-1.95) 5(0,-2.6) 6(0,-3.25) 7(0,-3.9) 8(0,-4.55) 9(0,-5.2) 10(0,-5.85) 11(5.842,-5.85) 12(5.842,-5.2) 13(5.842,-4.55) 14(5.842,-3.9) 15(5.842,-3.25) 16(5.842,-2.6) 17(5.842,-1.95) 18(5.842,-1.3) 19(5.842,-0.65) 20(5.842,0)
  rect 3.3x5.08 smd: 21(2.921,-3)
  silkscreen extent -1.32,-6.5 7.07,1.14, body extent 0.64,-6.2 5.08,0.28, height 2.65
IDC50X2-1.27MM_SMT [mm]
  rect 0.74x2.4 smd: 1(-31.115,-1.95) 2(-31.115,1.95) 3(-29.845,-1.95) 4(-29.845,1.95) 5(-28.575,-1.95) 6(-28.575,1.95) 7(-27.305,-1.95) 8(-27.305,1.95) 9(-26.035,-1.95) 10(-26.035,1.95) 11(-24.765,-1.95) 12(-24.765,1.95) 13(-23.495,-1.95) 14(-23.495,1.95) 15(-22.225,-1.95) 16(-22.225,1.95) 17(-20.955,-1.95) 18(-20.955,1.95) 19(-19.685,-1.95) 20(-19.685,1.95) 21(-18.415,-1.95) 22(-18.415,1.95) 23(-17.145,-1.95) 24(-17.145,1.95) 25(-15.875,-1.95) 26(-15.875,1.95) 27(-14.605,-1.95) 28(-14.605,1.95) 29(-13.335,-1.95) 30(-13.335,1.95) 31(-12.065,-1.95) 32(-12.065,1.95) 33(-10.795,-1.95) 34(-10.795,1.95) 35(-9.525,-1.95) 36(-9.525,1.95) 37(-8.255,-1.95) 38(-8.255,1.95) 39(-6.985,-1.95) 40(-6.985,1.95) 41(-5.715,-1.95) 42(-5.715,1.95) 43(-4.445,-1.95) 44(-4.445,1.95) 45(-3.175,-1.95) 46(-3.175,1.95) 47(-1.905,-1.95) 48(-1.905,1.95) 49(-0.635,-1.95) 50(-0.635,1.95) 51(0.635,-1.95) 52(0.635,1.95) 53(1.905,-1.95) 54(1.905,1.95) 55(3.175,-1.95) 56(3.175,1.95) 57(4.445,-1.95) 58(4.445,1.95) 59(5.715,-1.95) 60(5.715,1.95) 61(6.985,-1.95) 62(6.985,1.95) 63(8.255,-1.95) 64(8.255,1.95) 65(9.525,-1.95) 66(9.525,1.95) 67(10.795,-1.95) 68(10.795,1.95) 69(12.065,-1.95) 70(12.065,1.95) 71(13.335,-1.95) 72(13.335,1.95) 73(14.605,-1.95) 74(14.605,1.95) 75(15.875,-1.95) 76(15.875,1.95) 77(17.145,-1.95) 78(17.145,1.95) 79(18.415,-1.95) 80(18.415,1.95) 81(19.685,-1.95) 82(19.685,1.95) 83(20.955,-1.95) 84(20.955,1.95) 85(22.225,-1.95) 86(22.225,1.95) 87(23.495,-1.95) 88(23.495,1.95) 89(24.765,-1.95) 90(24.765,1.95) 91(26.035,-1.95) 92(26.035,1.95) 93(27.305,-1.95) 94(27.305,1.95) 95(28.575,-1.95) 96(28.575,1.95) 97(29.845,-1.95) 98(29.845,1.95) 99(31.115,-1.95) 100(31.115,1.95)
  Keep-Out Layer circle w0.203: c-30.48,0 r0.5
  Keep-Out Layer circle w0.203: c30.48,0 r0.5
  silkscreen extent -32,-3.5 32,3.5
L-6045 [mm]
  rect 1.7x5.7 smd: 1(0,0) 2(4.5,0)
  silkscreen extent 0,-3.3 4.57,3.3
L-8040 [mm]
  rect 1.9x7.5 smd: 1(0,0) 2(5.6,0)
  silkscreen extent -0.25,-4.19 5.6,4.19
MACRO-SIM [mm]
  rect 1x1.2 smd: 1(3.75,-10.86) 2(5.02,-10.86) 3(6.29,-10.86) 4(7.56,-10.86) 5(8.83,-10.86) 6(10.1,-10.86)
  rect 1.7x1.9 smd: ""(0,-0.01) ""(14.4,-0.01)
  silkscreen extent 0,-10.86 14.43,5.1
MICROUSB [mm]
  rect 1.8x1.9 smd: 0(-2.098,1.905) 0(0.762,1.905) 0(3.175,1.905) 0(6.002,1.905)
  rect 0.4x1.35 smd: 1(3.302,-0.745) 2(2.652,-0.745) 3(2.002,-0.745) 4(1.352,-0.745) 5(0.702,-0.745)
  Keep-Out Layer circle w0.1: c4.019,0 r0.3
  Keep-Out Layer circle w0.1: c0.006,0 r0.3
  silkscreen extent -1.78,-1.14 5.59,3.94
MINI-PCIE [mm]
  rect 0.6x2 smd: 1(0.7,-4.1) 2(1.1,4.1) 3(1.5,-4.1) 4(1.9,4.1) 5(2.3,-4.1) 6(2.7,4.1) 7(3.1,-4.1) 8(3.5,4.1) 9(3.9,-4.1) 10(4.3,4.1) 11(4.7,-4.1) 12(5.1,4.1) 13(5.5,-4.1) 14(5.9,4.1) 15(6.3,-4.1) 16(6.7,4.1) 17(10.3,-4.1) 18(10.7,4.1) 19(11.1,-4.1) 20(11.5,4.1) 21(11.9,-4.1) 22(12.3,4.1) 23(12.7,-4.1) 24(13.1,4.1) 25(13.5,-4.1) 26(13.9,4.1) 27(14.3,-4.1) 28(14.7,4.1) 29(15.1,-4.1) 30(15.5,4.1) 31(15.9,-4.1) 32(16.3,4.1) 33(16.7,-4.1) 34(17.1,4.1) 35(17.5,-4.1) 36(17.9,4.1) 37(18.3,-4.1) 38(18.7,4.1) 39(19.1,-4.1) 40(19.5,4.1) 41(19.9,-4.1) 42(20.3,4.1) 43(20.7,-4.1) 44(21.1,4.1) 45(21.5,-4.1) 46(21.9,4.1) 47(22.3,-4.1) 48(22.7,4.1) 49(23.1,-4.1) 50(23.5,4.1) 51(23.9,-4.1) 52(24.3,4.1)
  rect 2.3x3.2 smd: 53(-2.15,-3.5) 54(27.15,-3.5)
  rrect70% 0x0 hole 1.6: 55(0,0)
  rrect70% 0x0 hole 1.1: 56(25,0)
  Keep-Out Layer circle w0.203: c24.6,24 r1.5
  Keep-Out Layer circle w0.203: c24.6,48.1 r1.5
  silkscreen extent -2.8,-5.1 27.8,51.3
MSOP-8 [mm]
  rect 1.6x0.4 smd: 1(-2.1,0.975) 2(-2.1,0.325) 3(-2.1,-0.325) 4(-2.1,-0.975) 5(2.1,-0.975) 6(2.1,-0.325) 7(2.1,0.325) 8(2.1,0.975)
  rect 1.57x1.89 smd: 9(0,0)
  silkscreen extent -1.1,-1.5 1.1,1.5
OSC4-3225 [mm]
  rect 1.3x1.1 smd: 1(0,0) 2(2.3,0) 3(2.3,1.9) 4(0,1.9)
  silkscreen extent -1.28,-1.19 3.17,2.67
PH2.0-2-SMT [mm]
  rect 1.3x4 smd: 0(-2.2,5.715) 0(4.191,5.715)
  rect 1.2x3.5 smd: 1(0,0) 2(2,0)
  silkscreen extent -3.18,1.4 5.21,8
QFN-36 [mm]
  rect 1x0.28 smd: 1(-2.777,2) 2(-2.777,1.5) 3(-2.777,1) 4(-2.777,0.5) 5(-2.777,0) 6(-2.777,-0.5) 7(-2.777,-1) 8(-2.777,-1.5) 9(-2.777,-2) 19(2.823,-2) 20(2.823,-1.5) 21(2.823,-1) 22(2.823,-0.5) 23(2.823,0) 24(2.823,0.5) 25(2.823,1) 26(2.823,1.5) 27(2.823,2)
  rect 0.28x1 smd: 10(-1.977,-2.8) 11(-1.477,-2.8) 12(-0.977,-2.8) 13(-0.477,-2.8) 14(0.023,-2.8) 15(0.523,-2.8) 16(1.023,-2.8) 17(1.523,-2.8) 18(2.023,-2.8) 28(2.023,2.8) 29(1.523,2.8) 30(1.023,2.8) 31(0.523,2.8) 32(0.023,2.8) 33(-0.477,2.8) 34(-0.977,2.8) 35(-1.477,2.8) 36(-1.977,2.8)
  rect 3.7x3.7 smd: 37(0.023,0)
  silkscreen extent -3.08,-3.1 3.12,3.1
RJ45C-48F-01GY2DPL2NL [mm]
  round 1.5 hole 0.9: 1(0,0) 3(2.54,0) 4(3.81,-2.54) 5(5.08,0) 6(6.35,-2.54) 7(7.62,0) 8(8.89,-2.54) 9(10.16,0) 10(11.43,-2.54)
  rect 1.5x1.5 hole 0.9: 2(1.27,-2.54)
  round 1.6 hole 1: 11(-0.915,-13.565) 12(1.625,-13.565) 13(9.805,-13.565) 14(12.345,-13.565)
  oval 3x2.54 hole 1.7: 15(-2.035,-5.59) 16(13.465,-5.59)
  Keep-Out Layer circle w0.178: c0,-8.64 r1.7
  Keep-Out Layer circle w0.178: c11.43,-8.64 r1.7
  silkscreen extent -2.48,-19.54 13.92,1.77
SDRH0420 [mm]
  rect 1.6x3.9 smd: 1(-1.45,0) 2(1.45,0)
  silkscreen extent -0.35,-2.1 0.35,2.1
SMA [mm]
  rect 2x2 smd: A(-2,0) K(2,0)
  silkscreen extent -3.2,-1.5 3.2,1.5
SOIC16-1.27 [mm]
  rect 2.4x0.6 smd: 1(-2.432,3.787)
  oval 2.4x0.6 smd: 2(-2.432,2.517) 3(-2.432,1.247) 4(-2.432,-0.023) 5(-2.432,-1.293) 6(-2.432,-2.563) 7(-2.432,-3.833) 8(-2.432,-5.103) 9(2.568,-5.103) 10(2.568,-3.833) 11(2.568,-2.563) 12(2.568,-1.293) 13(2.568,-0.023) 14(2.568,1.247) 15(2.568,2.517) 16(2.568,3.787)
  silkscreen extent -1.93,-5.96 2.07,4.64
SOP8-1.27 [mm]
  rect 2x0.5 smd: 1(0,0)
  oval 2x0.5 smd: 2(0,-1.27) 3(0,-2.54) 4(0,-3.81) 5(5.85,-3.81) 6(5.85,-2.54) 7(5.85,-1.27) 8(5.85,0)
  silkscreen extent 1.35,-4.29 4.54,0.53
SOP8-POW [mm]
  oval 1.7x0.8 smd: 1(-2.675,1.905) 2(-2.675,0.635) 3(-2.675,-0.635) 4(-2.675,-1.905) 5(2.675,-1.905) 6(2.675,-0.635) 7(2.675,0.635) 8(2.675,1.905)
  rect 2.8x3.4 smd: 6(0,0)
  silkscreen extent -3.78,-2.7 3.77,2.83
SOP14-1.27 [mm]
  rect 2x0.5 smd: 1(0,0)
  oval 2x0.5 smd: 2(0,-1.27) 3(0,-2.54) 4(0,-3.81) 5(0,-5.08) 6(0,-6.35) 7(0,-7.62) 8(7,-7.62) 9(7,-6.35) 10(7,-5.08) 11(7,-3.81) 12(7,-2.54) 13(7,-1.27) 14(7,0)
  silkscreen extent 0.76,-8.38 6.1,0.76
SOT23-5N [mm]
  rect 1.05x0.65 smd: 1(-1.225,0.95) 2(-1.225,0) 3(-1.225,-0.95) 4(1.225,-0.95) 5(1.225,0.95)
  silkscreen extent -2.16,-1.91 2.16,1.91, body extent -0.87,-1.5 0.88,1.5, height 1.1
SOT-23#1 [mil] "SOT23, 3-Leads, Body 3.0x2.6mm (max), Pitch 0.95mm, IPC Medium Density"
  rect 49x24 smd: 1(-14.05,-78.06) 2(-14.05,-2.06) 3(-101.05,-41.06)
  silkscreen extent -85,-101 -56,20
SOT-23#2 [mil]
  rect 55x40 smd: 1(-14.05,-78.06) 2(-14.05,-2.06) 3(-101.05,-41.06)
  silkscreen extent -85,-101 -56,20
SOT-23-PMOS [mm]
  rect 1.25x0.6 smd: 1(-0.925,0.95) 2(-0.925,-0.95) 3(0.925,0)
  silkscreen extent -1.91,-1.78 1.91,1.78, body extent -0.7,-1.5 0.7,1.5, height 1.1
SS-SPB-4.5 [mm]
  rect 1.5x1 smd: 1(-3.15,1.5) 2(3.15,1.5) 3(3.15,-1.5) 4(-3.15,-1.5)
  silkscreen extent -2.25,-2.25 2.25,2.25
TF-CARD [mm]
  rect 1.6x0.7 smd: 1(1.82,-1.466) 2(1.82,-0.366) 3(1.82,0.734) 4(1.82,1.834) 5(1.82,2.934) 6(1.82,4.034) 7(1.82,5.134) 8(1.82,6.234) 9(1.82,7.334)
  rect 1.4x1 smd: 10(1.32,8.634)
  rect 2.2x1.2 smd: 11(-8.28,8.534) 12(-8.28,-6.966)
  rect 1.4x1.6 smd: 13(1.32,-6.066)
  Keep-Out Layer circle w0.203: c-8.68,-2.266 r0.5
  Keep-Out Layer circle w0.203: c-8.68,5.734 r0.5
  silkscreen extent -12.7,-6.37 1.12,8.13
USB-D [mm]
  rect 1.27x1.4 hole 0.85: 1(3.5,-2.49) 5(3.5,0.13)
  oval 1.27x1.4 hole 0.85: 2(1,-2.49) 3(-1,-2.49) 4(-3.5,-2.49) 6(1,0.13) 7(-1,0.13) 8(-3.5,0.13)
  round 3.5 hole 2.3: 9(6.57,-2.84) 10(-6.57,-2.84) 11(6.57,2.84) 12(-6.57,2.84)
  silkscreen extent -7.55,-3.88 7.55,13.12
VH3.96-2P-SMT#1 [mm]
  rect 1.2x4 smd: 0(-3,-10.5) 0(6.96,-10.5)
  rect 2.5x5 smd: 1(3.96,0) 2(0,0)
  silkscreen extent -4.06,-12.7 8,-1.52
VH3.96-2P-SMT#2 [mm]
  rect 1.25x3.85 smd: 0(-3,-10.5)
  rect 1.2x4 smd: 0(6.96,-10.5)
  rect 2.5x5 smd: 1(3.96,0) 2(0,0)
  silkscreen extent -4.06,-12.7 8,-1.52
WSON8 [mm] "DRV8837"
  rect 0.7x0.3 smd: 1(-1.05,0.25) 2(-1.05,-0.4) 3(-1.05,-1.05) 4(-1.05,-1.655) 5(1.05,-1.655) 6(1.05,-1.05) 7(1.05,-0.4) 8(1.05,0.25)
  rect 1x2.032 smd: 2(0,-0.679)
  silkscreen extent -2.02,-2.04 1.65,0.95

## Part data
BT1: library part 电池
C1 C2 C6 C7 C17 C18 C19 C20 C21 C22 C23 C24 C25 C27 C28 C30 C31 C32 C34 C35 C37 C38 C39 C40 C41 C42 C43 C44 C45 C46 C47 C48 C49 C50 C52 C53 C54 C55 C56 C86 C87 C88 C109 C110 C111 C112 C113 C114 C115 C116 C117 C118 C119: library part 电容, "电容"
C3 C5: "Polarized Capacitor (Surface Mount)"
C4 C57 C58 C59 C60 C61 C62 C63 C64: "Capacitor"
C29 C36: library part 直插电解电容, "直插电解电容"
C65 C84: library part ELECTRO
C66 C67 C68 C69 C70 C71 C72 C73 C74 C75 C76 C77 C78 C79 C80 C81 C82 C83 C85: library part CAP
D1 D2 D6 D7 D11 D12 D13 D14 D15: library part SS24
D4 D9 D10: "SCHOTTKY DIODE"
D16 D17 D18 D19 D20 D21 D22 D23 D24 D25 D26 D27 D28 D29 D30 D31 D32 D33: library part 电感
F1: "Thermal Fuse"
F2: library part FUSE, "贴片自恢复保险丝"
J1 J2: "ASTRON B2B Connector"
J7 J8: "USB DOUBLE PORTS"
J9: "小USB插痤"
J21: library part MINIPCIE, "MPC24-52K3311"
K1 K2: library part 按键, "按键"
L4: library part 电感, "电感"
L7 L8 L9 L10: library part INCLUDE
L11: library part 功率电感
P1: "Header, 15-Pin, Dual row"
P2: library part "Header 2X2", "Header, 2-Pin, Dual row"
P3: library part "Header 3", "Header, 3-Pin"
P4 P6 P9: library part "Header 2", "Header, 2-Pin"
P5: "Header, 6-Pin"
R1 R2 R3 R37 R38 R39 R40 R41 R42 R43 R44: "Resistor"
R8 R9 R10 R11 R12 R13 R14 R15 R16 R17 R18 R19 R20 R21 R22 R23 R24 R25 R26 R27 R28 R29 R30 R31 R32 R33 R34 R35 R36 R58 R59 R87 R88 R89 R90 R93 R104 R105 R112 R113 R114 R115 R116 R119: library part 电阻, "电阻"
R45 R46 R47 R48 R49 R50 R51 R52 R53 R56 R57 RS1 RS2: library part RES
U1: library part LM22676-5.0
U5 U8: library part MAX232ESE
U6: library part USB2514, "USB2514Bi"
U7: library part TPS2061, "TPS2061DGN"
U10: library part TPA3116D2
U25: "I2C interface RTC with crystal built-in"
X1: library part 表贴晶体, "4PIN表贴晶体"

## Free pads (board coordinates)
  round 196.85 hole 118.11: 0(0,0) 0(1850.39,-4094.49) 0(6023.62,-4094.49) 0(6023.62,0)
  round 157.48 hole 118.11: 0(1783.83,-790.72)
  rect 157.48x157.48 hole 118.11: 0(4461,-2523)

## Via types
v1: diameter 20, hole 12, Top Layer to Bottom Layer, 140 vias
v2: diameter 24, hole 14, Top Layer to Bottom Layer, 84 vias
v3: diameter 22, hole 14, Top Layer to Bottom Layer, 57 vias
v4: diameter 23, hole 13, Top Layer to Bottom Layer, 38 vias
v5: diameter 22, hole 13, Top Layer to Bottom Layer, 21 vias
v6: diameter 30, hole 22, Top Layer to Bottom Layer, tented top, 15 vias
v7: diameter 22, hole 18, Top Layer to Bottom Layer, 6 vias
v8: diameter 20, hole 15, Top Layer to Bottom Layer, 5 vias
v9: diameter 24, hole 13, Top Layer to Bottom Layer, 5 vias
v10: diameter 18, hole 10, Top Layer to Bottom Layer, 4 vias
v11: diameter 22, hole 12, Top Layer to Bottom Layer, 3 vias
v12: diameter 28, hole 16, Top Layer to Bottom Layer, 3 vias
v13: diameter 26, hole 15, Top Layer to Bottom Layer, 3 vias
v14: diameter 18, hole 11, Top Layer to Bottom Layer, 2 vias
v15: diameter 30, hole 15, Top Layer to Bottom Layer, 2 vias
v16: diameter 30, hole 16, Top Layer to Bottom Layer, 1 vias
v17: diameter 18, hole 12, Top Layer to Bottom Layer, 1 vias
v18: diameter 28, hole 15, Top Layer to Bottom Layer, 1 vias
v19: diameter 25, hole 15, Top Layer to Bottom Layer, 1 vias
v20: diameter 28, hole 17, Top Layer to Bottom Layer, 1 vias

## Nets (pads, with @x,y where several pads share a name; then routed paths per layer and width w, separated by ;. In a path a pad name is that pad's centre, name@x,y a point inside that pad or via, vN(x,y) a via of type N, cw(c..) or ccw(c..) an arc to the next point about the centre after c; other vN are vias at no path point)
485_A: D17.2 P2.3 R16.1 R17.2 U3.6 | length 2521.3
  Top Layer w12: U3.6@4321.31,-1808 v1(4391,-1808) ; R17.2@5201,-2828 R16.1@5256,-2828 ; D17.2@5206.91,-2897.09 5206.91,-2828 R16.1@5256,-2828 ; v1(5328.5,-2790.5) 5291,-2828 R16.1@5256,-2828
  Bottom Layer w12: v1(4391,-1808) 5241,-1808 5311,-1878 5311,-2773 5346,-2808 5522.18,-2808 P2.3@5607.54,-2893.35
485_B: D16.2 P2.1 R15.1 R16.2 U3.7 | length 2326.7
  Top Layer w12: U3.7@4321.31,-1758 v1(4391,-1758) ; R15.1@5141,-2763 5206,-2698 5361,-2698 P2.1@5391,-2728 ; R16.2@5256,-2768 5256,-2703
  Bottom Layer w12: v1(4391,-1758) 5276,-1758 5391,-1873 P2.1@5391,-2728
485_DE1: U3.2 U3.3 U4.4 | length 249.5
  Top Layer w12: U3.2@4091,-1758 U3.3@4091,-1808 4146,-1808 4162.77,-1824.77 U4.4@4162.77,-1945.6
+12V: C3.1 D1.K F1.2 U1.7 | length 267.1
  Top Layer w40: 4796,-2265 U1.7@4796,-2198.31
  Top Layer w80: D1.K@4614.74,-2333 4801,-2333 4811,-2343
AU_MUTE: J1.71 R56.1 R57.2 | length 3082.1
  Top Layer w10: R56.1@856,-2433 R57.2@906,-2433 906,-2368 921,-2353 v5(1386,-2353) ; J1.71@3601,-2597.25 v5(3601,-2533)
  Bottom Layer w10: v5(1386,-2353) 1426,-2393 1756,-2393 1821,-2328 3521,-2328 3551,-2358 3551,-2483 v5(3601,-2533)
AUGND: C65.2 C66.2 C70.1 C72.2 C73.1 C76.1 C80.2 C83.2 C84.2 D12.A D13.A D14.A D15.A J2.98 L2.2 R48.2 R50.2 R53.2 U10.1 U10.9 U10.13 U10.14 U10.15 U10.22 U10.25 U10.28 U10.33 | length 4908.5
  Top Layer w12: v1(716,-2423) R53.2@741,-2423 ; U10.22@1055,-2940.18 U10.33@1055,-2860 ; U10.33@1106.28,-2754 U10.9@1106.28,-2648 ; U10.25@1131.87,-2943.28 U10.33@1131.87,-2868 ; U10.33@1198,-2868 1208.64,-2878.64 U10.28@1208.64,-2943.28
  Top Layer w15: C66.2@841,-2848 v5@841,-2818 ; R50.2@1126,-2433 C73.1@1177,-2433 ; U10.1@1316,-2648 v5@1333,-2648 ; C83.2@1386,-2843 v5@1386,-2812 ; v2@1398,-2418 R48.2@1436,-2418
  Top Layer w30: 1713,-2409 1784,-2338 2532,-2338 2580,-2290 2580,-1835 2673,-1742 3777,-1742 3886,-1633 4142,-1633 4475,-1300 4475,-639 4453,-617 4364,-617 4341.31,-639.69 J2.98@4341.31,-713.94
  other v1: 1061,-2858 1101,-2858 1141,-2858 1181,-2858 1061,-2828 1101,-2828 1141,-2828 1181,-2828 1061,-2798 1101,-2798 1141,-2798 1181,-2798 1061,-2768 1101,-2768 1141,-2768 1181,-2768 1061,-2738 1101,-2738 1141,-2738 1181,-2738
  other v2: 631,-3673 631,-3653 631,-3633 967,-2597 992,-2597 1151,-2433 1397,-2418
  other v3: 311,-2943 331,-2943 351,-2943
  other v4: 1726,-2893 1746,-2893 1731,-2458 1731,-2438 1731,-2418
  other v5: 1139,-3656 1666,-3640 1128,-3637 1150,-3637 1666,-3618 841,-2816 1386,-2811 1334,-2648
BAT_RTC: J2.94 R119.1 | length 378.2
  Top Layer w8: J2.94@4241,-714.26 J2.94@4241.31,-713.94
  Top Layer w10: R119.1@4132,-1030 4159,-1030 4172,-1017 v1(4172,-947) ; v1(4241,-778) J2.94@4241,-714.26
  Bottom Layer w10: v1@4172,-948 v1(4172,-947) 4172,-847 v1(4241,-778)
BG_EN: J1.73 R42.2 | length 4627
  Top Layer w10: R42.2@106,-3178 106,-2353 156,-2303 v5(1546,-2303) ; J1.73@3653.52,-2599.77 v5(3653.5,-2535.5)
  Bottom Layer w10: v5(1546,-2303) 3546,-2303 3581,-2338 3581,-2463 v5(3653.5,-2535.5)
BG_PWM: J1.75 R40.2 | length 4809.4
  Top Layer w10: R40.2@6,-3178 6,-2338 66,-2278 v5(1576,-2278) ; v5(3698.5,-2535.5) 3698.5,-2594.75 J1.75@3703.52,-2599.77
  Bottom Layer w10: v5(1576,-2278) 3576,-2278 3616,-2318 3616,-2453 v5(3698.5,-2535.5)
CAN1_RX: J2.12
CAN1_TX: J2.10
CAN2_RX: J2.7
CAN2_TX: J2.9
CCM_CLKO2: J2.36
CLK1_N: C114.1 J2.83 | length 4038.5
  Top Layer w7: C114.1@546,-1608 546,-1589 593,-1542 593,-1481.37 635.37,-1439 3851,-1439 3886,-1404 3886,-1222 v1(3886,-1203) ; v1@3975,-948 3976,-948 3992,-932 J2.83@3992,-897
  Bottom Layer w7: v1(3886,-1203) 3895.5,-1193.5 3922.63,-1193.5 3972,-1144.13 3972,-951 v1@3975,-948
  other v1: 3981,-948
CLK1_P: C115.1 J2.81 | length 4068.3
  Top Layer w7: C115.1@656,-1608 656,-1589 609,-1542 609,-1488 642,-1455 3857.63,-1455 3902,-1410.63 3902,-1222 3911,-1213 3911,-1188 3891,-1168 v1(3886,-1168) ; v1(3940,-934) 3941.31,-932.69 J2.81@3941.31,-891
  Bottom Layer w7: v1(3886,-1168) 3895.5,-1177.5 3916,-1177.5 3956,-1137.5 3956,-950 v1(3940,-934)
CLK1O_N: C114.2 J21.11 R87.2 | length 603.2
  Top Layer w8: J21.11@526,-2153 526,-2114 643,-1997 643,-1793 552,-1702 C114.2@552,-1675
  Top Layer w15: 507,-1668 C114.2@546,-1668
CLK1O_P: C115.2 J21.13 R88.2 | length 565.1
  Top Layer w8: J21.13@559,-2151 559,-2111 663,-2007 C115.2@663,-1679
  Top Layer w15: R88.2@601,-1668 C115.2@651,-1668
CSI0_HSYNCH: J2.37
CSI0_PIXCLK: J2.38
CSI_CLK0_N: J2.61
CSI_CLK0_P: J2.63
CSI_D0_N: J2.71
CSI_D0_P: J2.69
CSI_D1_N: J2.67
CSI_D1_P: J2.65
D_RXD: D20.1 J6.2 U5.8 | length 357.5
  Top Layer w10: U5.8@4861,-3498 4871,-3508 4871,-3558 4890.91,-3577.91 D20.1@4890.91,-3633.91 4961.91,-3633.91 5020.17,-3692.17 J6.2@5020.17,-3748
D_TXD: D21.1 J6.3 U5.7 | length 436
  Top Layer w10: U5.7@4875.24,-3448.91 4896.91,-3448.91 4911,-3463 4911,-3528 5020.09,-3637.09 D21.1@5056.09,-3637.09 ; D21.1@5061.09,-3637.09 5061.09,-3679.75 J6.3@5129.33,-3748
DISP0_CLK: J1.32
DISP0_CNTRST: J1.2
DISP0_DAT0: J1.26
DISP0_DAT1: J1.25
DISP0_DAT2: J1.24
DISP0_DAT3: J1.23
DISP0_DAT4: J1.22
DISP0_DAT5: J1.21
DISP0_DAT6: J1.20
DISP0_DAT7: J1.19
DISP0_DAT8: J1.18
DISP0_DAT9: J1.17
DISP0_DAT10: J1.16
DISP0_DAT11: J1.15
DISP0_DAT12: J1.14
DISP0_DAT13: J1.13
DISP0_DAT14: J1.12
DISP0_DAT15: J1.11
DISP0_DAT16: J1.10
DISP0_DAT17: J1.9
DISP0_DAT18: J1.8
DISP0_DAT19: J1.7
DISP0_DAT20: J1.6
DISP0_DAT21: J1.5
DISP0_DAT22: J1.4
DISP0_DAT23: J1.3
DISP0_DRDY: J1.30
DISP0_HSYNCH: J1.27
DISP0_VSYNCH: J1.28
EARTH: J3.BO1 J3.BO2 J5.15 J5.16 J6.BO1 J6.BO2 J7.9 J7.10 J7.11 J7.12 J8.9 J8.10 J8.11 J8.12 L3.2 P4.0 P5.0 P7.0 P8.0 P9.0 pad.0@1850.39,-4094.49 pad.0@6023.62,-4094.49
ECSPI1_CLK: J1.66
ECSPI1_CS1: J1.68
ECSPI1_MISO: J1.63
ECSPI1_MOSI: J1.61
ECSPI5_CLK: J1.72
ECSPI5_CS0: J1.70
ECSPI5_MISO: J1.65
ECSPI5_MOSI: J1.67
EIM_BCLK: J1.35
EIM_CS0: J1.55
EIM_CS1: J1.56
EIM_DA0: J1.54
EIM_DA1: J1.53
EIM_DA2: J1.52
EIM_DA3: J1.51
EIM_DA4: J1.50
EIM_DA5: J1.49
EIM_DA6: J1.48
EIM_DA7: J1.47
EIM_DA8: J1.46
EIM_DA9: J1.45
EIM_DA10: J1.44
EIM_DA11: J1.43
EIM_DA12: J1.42
EIM_DA13: J1.41
EIM_DA14: J1.40
EIM_DA15: J1.39
EIM_DATA0: J2.40
EIM_DATA1: J2.39
EIM_DATA2: J2.42
EIM_DATA3: J2.41
EIM_DATA4: J2.44
EIM_DATA5: J2.43
EIM_DATA6: J2.46
EIM_DATA7: J2.45
EIM_DATA8: J2.48
EIM_DATA9: J2.47
EIM_DATA10: J2.50
EIM_DATA11: J2.49
EIM_DATA12: J2.52
EIM_DATA13: J2.51
EIM_DATA14: J2.54
EIM_DATA15: J2.53
EIM_EB0: J1.64
EIM_EB1: J1.57
EIM_LBA: J1.62
EIM_OE: J1.58
EIM_RW: J1.60
EIM_WAIT: J1.37
GAIN: R49.1 R50.1 U10.8 | length 142.8
  Top Layer w10: R50.1@1118,-2494 1118,-2585 1132,-2599 U10.8@1132,-2631